# Altium PCB PCB3.PcbDoc
Units mil, origin at the board's own origin, x right, y up, seen from the top; angles counter-clockwise.
Board outline 3125 x 4000 mil, 2 copper layers (Top Layer, Bottom Layer); 12 components, 17 nets, 64 pads, 0 vias.
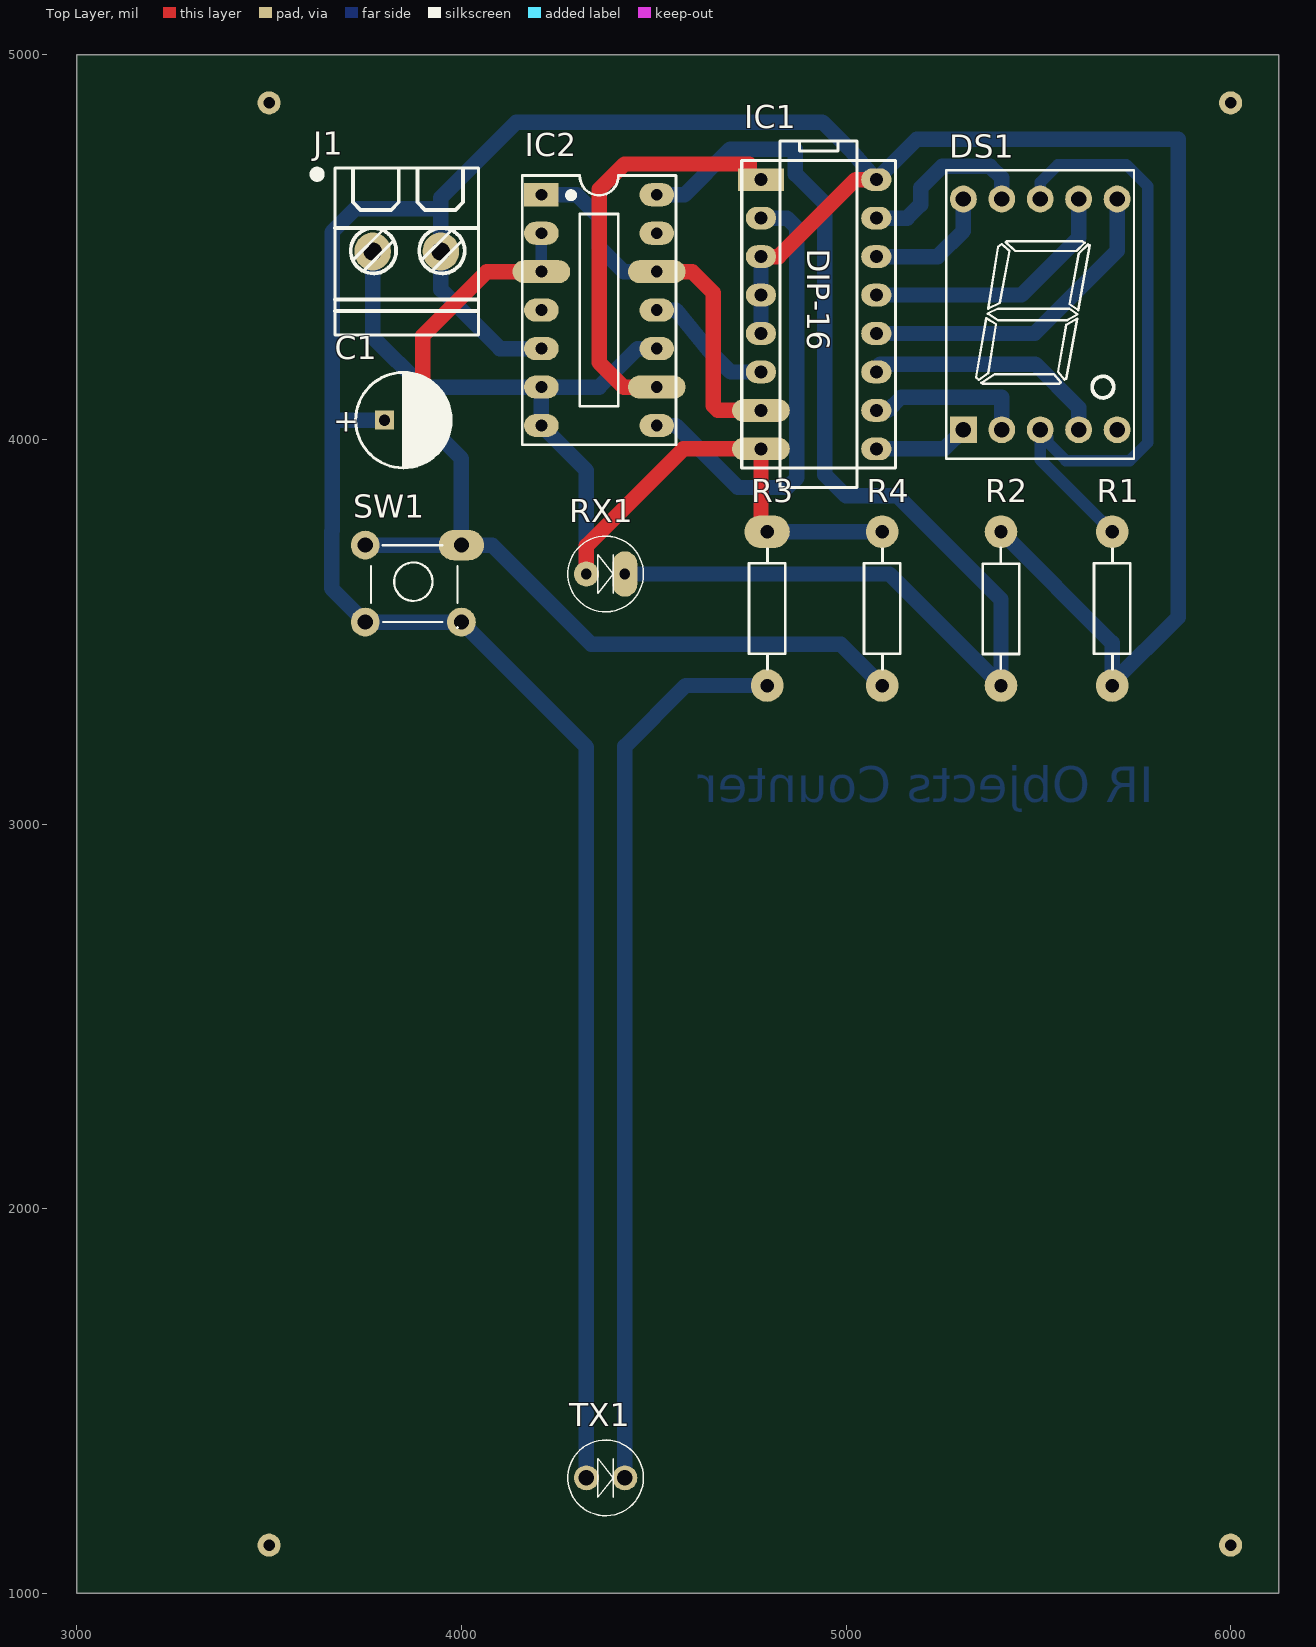
[diagram p0: Top Layer view]
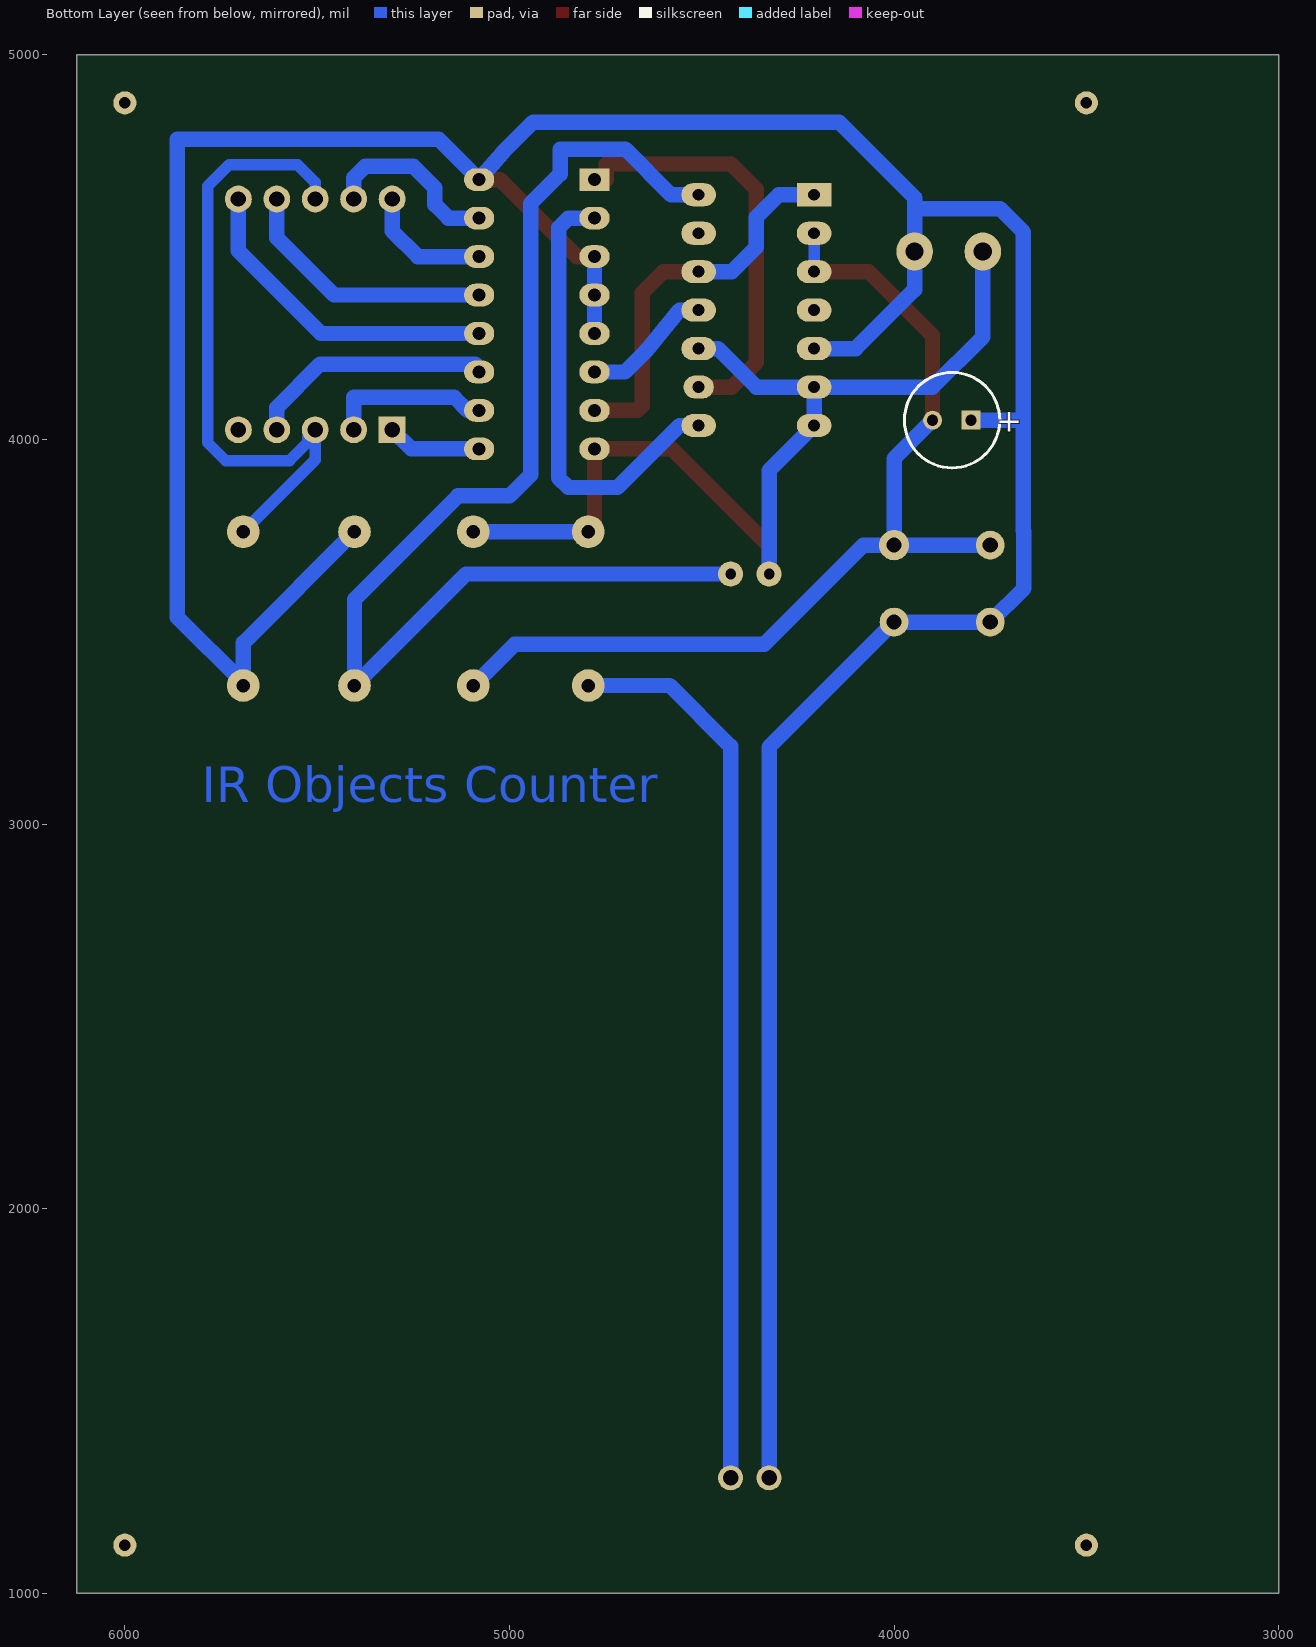
[diagram p1: Bottom Layer view, seen from below]
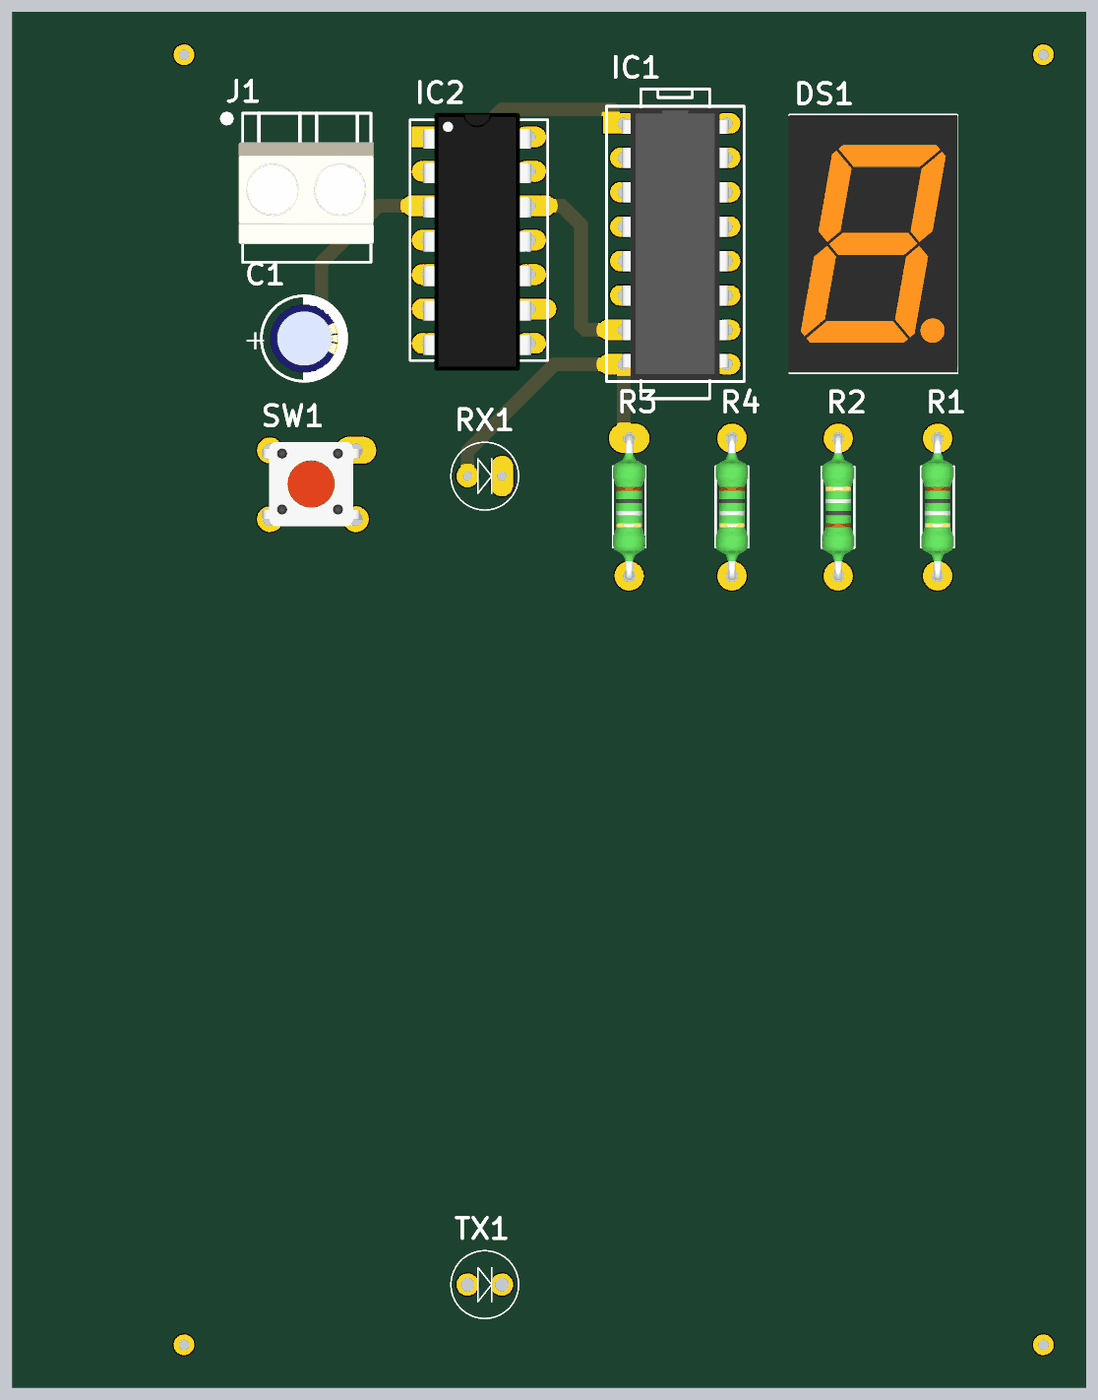
[diagram p2: 3D render of the assembled board from above, using the file's embedded part models]

## Layer stack, top to bottom
Top Solder: solder mask 0.4, Solder Resist, Dk 3.5
Top Layer: signal copper 1.4
Dielectric 1: dielectric 12.6, FR-4, Dk 4.8
Bottom Layer: signal copper 1.4
Bottom Solder: solder mask 0.4, Solder Resist, Dk 3.5

## Board outline
3000,1000 6125,1000 6125,5000 3000,5000

## Design rules (kind name [scope] priority, off if disabled: settings)
Clearance [All] p1: gap=30
PolygonConnect [All] p1: connectstyle=Relief reliefconductorwidth=10 reliefentries=4 polygonreliefangle="90 Angle" airgapwidth=10
RoutingCorners [All] p1: cornerstyle=90-Degree minsetback=100 maxsetback=100
RoutingVias [All] p1: holewidth=28 width=80 viastyle="Through Hole" minholewidth=28 minwidth=80 maxholewidth=28 maxwidth=80
SolderMaskExpansion [All] p1: expansion=4
Width [All] p1: maxlimit=40 minlimit=20 preferedwidth=40
29 further rules are at their usual default settings.

## Components (designator, comment, footprint, x,y, rotation, side; value= is the part's Value field where it differs from the comment)
C1 "Cap Pol" "RADIAL C" 3800,4050 r0 top
DS1 "7SEG" LED7SEG-1-0.56 5500,4300 r0 top
IC1 "7447" DIP16 4929,4325 r270 top
IC2 "7490" DIP14 4208,4636 r270 top
J1 "CON.Domino2" "Domino 2M" 4044,4272 r90 top
R1 "1KR" RES-1/4W#1 5697,3575 r90 top
R2 "1KR" RES-1/4W#1 5398,3545 r270 top
R3 "100R" RES-1/4W#2 4800,3575 r90 top
R4 "1KR" RES-1/4W#1 5099,3575 r90 top
RX1 "LED" LED-5MM-BLUE 4325,3650 r0 top
SW1 "SW" SW2-DIP 3750,3725 r0 top
TX1 "LED" LED-5MM-WHITE 4325,1300 r0 top

## Footprints (in the part's own frame and the unit in brackets; to place one, negate y for a bottom-side part, rotate by r counter-clockwise, add the part's x,y. Pads: shape width x height; smd on the part's side, far side on the other; paste and mask are expansions set on the pad)
DIP14 [mil] "DIP, 14-Leads, Row Spacing 7.62mm, Pitch 2.54mm, Body 19.2x6.6mm"
  rect 60x90 hole 31: 1(0,0)
  oval 60x90 hole 31: 2(100,0) 4(300,0) 5(400,0) 6(500,0) 7(600,0) 8(600,300) 10(400,300) 11(300,300) 13(100,300)
  oval 60x150 / inner oval 60x150 / far side oval 60x90 hole 31: 3(200,0) 12(200,300)
  oval 60x150 / inner oval 60x150 / far side oval 60x78.74 hole 31: 9(500,300)
  oval 60x90 / inner oval 60x150 / far side oval 60x90 hole 31: 14(0,300)
  silkscreen extent -50,-50 650,350, body extent -70,-12 680,302, height 145
DIP16 [mm]
  rect 1.5x3.048 / inner rect 1.5x3.048 / far side rect 1.5x2 hole 0.864: 1(-8.897,-3.812)
  oval 1.5x2 hole 0.864: 2(-6.357,-3.812) 3(-3.817,-3.812) 4(-1.277,-3.812) 5(1.263,-3.812) 6(3.803,-3.812) 9(8.883,3.808) 10(6.343,3.808) 11(3.803,3.808) 12(1.263,3.808) 13(-1.277,3.808) 14(-3.817,3.808) 15(-6.357,3.808) 16(-8.897,3.808)
  oval 1.5x3.81 / inner oval 1.5x3.81 / far side oval 1.5x2 hole 0.864: 7(6.343,-3.812) 8(8.883,-3.812)
  silkscreen extent -11.44,-5.08 11.42,5.08, body extent -10,-3.93 10,3.94, height 1.99
"Domino 2M" [mm]
  oval 2.5x2.4 hole 1.2: 1(5.5,6.975) 2(5.5,2.475)
  silkscreen extent 0,0 11,10.9, body extent 1.35,-0.22 8.85,9.78, height 10
LED7SEG-1-0.56 [mil]
  rect 70x70 hole 40: 1(-195,-275)
  round 70 hole 40: 2(-95,-275) 3(5,-275) 4(105,-275) 5(205,-275) 6(205,325) 7(105,325) 8(5,325) 9(-95,325) 10(-195,325)
  silkscreen extent -239,-350 249,400, body extent -241,-349 251,399, height 315
LED-5MM-BLUE [mil]
  round 65 hole 27.56: 1(0,0)
  oval 65x118.11 / inner oval 65x118.11 / far side round 65 hole 27.56: 2(100,0)
  silkscreen extent -48,-98 148,98, body extent -54,-105 155,105, height 370
LED-5MM-WHITE [mil]
  round 65 hole 40: 1(0,0) 2(100,0)
  silkscreen extent -48,-98 148,98, body extent -54,-105 155,105, height 370
"RADIAL C" [mm] "Capacitor, Electrolytic, Radial; Body 6.3 x 6.8 mm (Dia.xH typ); Pin Spacing 2.5 mm (typ)"
  rect 1.25x1.25 hole 0.75: 1(0,0)
  round 1.25 hole 0.75: 2(2.54,0)
  silkscreen extent -1.9,-3.15 4.4,3.15, body extent -1.27,-2.54 3.81,2.54, height 13.7
RES-1/4W#1 [mil]
  round 85 hole 35: 1(-215,5) 2(185,5)
  silkscreen extent -173,-42 141,52, body extent -227,-42 197,52, height 95
RES-1/4W#2 [mil]
  round 85 hole 35: 1(-215,5)
  oval 85x118.11 / inner oval 85x118.11 / far side round 85 hole 35: 2(185,5)
  silkscreen extent -173,-42 141,52, body extent -227,-42 197,52, height 95
SW2-DIP [mm] "SW button 4pin, 250 x250 mil"
  round 1.905 hole 1: 1(0,0) 2(0,-5.08) 3(6.35,-5.08)
  oval 3x2 / inner oval 3x2 / far side round 2 hole 1: 4(6.35,0)
  silkscreen extent 0.38,-5.46 6.1,0, body extent -0.9,-5.59 7,0.61, height 7

## Part data
C1: "Polarized Capacitor"
DS1: library part LED7SEG-1, "14.2 mm General Purpose Blue 7-Segment Display: CC, RH DP, Gray Surface"
IC1: "BCD to 7-Segment Decoder/Driver"
IC2: "4-Bit Decade Counter"
J1: "2 pins Domino Header"
R1 R2 R3 R4: library part Res, "Res"
RX1 TX1: "LED Single colour Green and Red"
SW1: library part SW4, "Switch button 4 pin"

## Free pads (board coordinates)
  round 60 hole 30: 0(6000,4875) 1(6000,1125) 2(3500,1125) 3(3500,4875)

## Nets (pads, with @x,y where several pads share a name; then routed paths per layer and width w, separated by ;. In a path a pad name is that pad's centre, name@x,y a point inside that pad or via, vN(x,y) a via of type N, cw(c..) or ccw(c..) an arc to the next point about the centre after c; other vN are vias at no path point)
GND: IC1.8 IC2.6 IC2.7 IC2.10 J1.1 R3.2 R4.2 RX1.1 | length 2752.3
  Top Layer w40: RX1.1 4325,3723 4577.29,3975.29 IC1.8 4778.92,3760 R3.2
  Bottom Layer w40: J1.1 3769.39,4266.61 3900,4136 IC2.6 ; RX1.1 4325,3919 IC2.7 IC2.6 ; IC2.10 4458,4236 4358,4136 IC2.6 ; R3.2 R4.2
NetC1_2: C1.2 IC2.2 IC2.3 R4.1 SW1.1 SW1.4 | length 2558.4
  Top Layer w40: C1.2 3900,4270 4066,4436 IC2.3
  Bottom Layer w30: IC2.3 IC2.2
  Bottom Layer w40: SW1.1 SW1.4 ; C1.2 4000,3950 SW1.4 ; R4.1 4987,3467 4338,3467 4080,3725 SW1.4
NetDS1_1: DS1.1 IC1.9 | length 246.7
  Bottom Layer w40: IC1.9 5255.29,3975.29 DS1.1
NetDS1_2: DS1.2 IC1.10 | length 425
  Bottom Layer w39.37: IC1.10 5109.29,4075.29 5143.69,4109.69 5405,4109.69 DS1.2
NetDS1_3: DS1.3 DS1.8 R1.2 | length 1727.3
  Bottom Layer w30: DS1.3@5505,4011.86 DS1.3 ; DS1.8 5505,4668 5551,4714 5729.14,4714 5785,4658.14 5785,3991.86 5738.14,3945 5571.86,3945 5525,3991.86 5525,4005 DS1.3 ; R1.2 5505,3947 DS1.3
NetDS1_4: DS1.4 IC1.11 | length 660.1
  Bottom Layer w40: IC1.11 5086.22,4168 5086.22,4193.22 5088.77,4195.77 5492.23,4195.77 5605,4083 DS1.4
NetDS1_6: DS1.6 IC1.12 | length 850
  Bottom Layer w40: IC1.12 5490.29,4275.29 5705,4490 DS1.6
NetDS1_7: DS1.7 IC1.13 | length 688.7
  Bottom Layer w40: IC1.13 5456.29,4375.29 5605,4524 DS1.7
NetDS1_9: DS1.9 IC1.15 | length 474.9
  Bottom Layer w40: IC1.15 5159,4575.29 5194,4610.29 5194,4654 5250,4710 5375,4710 5405,4680 DS1.9
NetDS1_10: DS1.10 IC1.14 | length 336.7
  Bottom Layer w40: IC1.14 5238.36,4475.29 5305,4541.94 DS1.10
NetIC1_1: IC1.1 IC2.9 | length 1115.5
  Top Layer w40: IC2.9 4422,4136 4358,4200 4358,4650 4424,4716 4748,4716 4748,4675.29 IC1.1
NetIC1_2: IC1.2 IC2.8 | length 1194.6
  Bottom Layer w40: IC2.8 4558,4036 4719,3875 4847,3875 4872,3900 4872,4550 4846.71,4575.29 IC1.2
NetIC1_6: IC1.6 IC2.11 | length 343.6
  Bottom Layer w40: IC2.11 4558,4336 4644,4231.29 4700,4175.29 IC1.6
NetIC1_7: IC1.7 IC2.1 IC2.12 | length 1020.9
  Top Layer w40: IC2.12 4600,4436 4655,4381 4655,4087.29 4667,4075.29 IC1.7
  Bottom Layer w40: IC2.1 4300,4636 4358,4578 4358,4500 4422,4436 IC2.12
NetIC2_14: IC2.14 R2.2 RX1.2 | length 3202.4
  Bottom Layer w40: RX1.2 5113,3650 R2.2 5403,3584 5134,3853 5000,3853 4945,3908 4945,4613 4868.3,4689.7 4868.3,4754.82 4698.82,4754.82 4580,4636 IC2.14
NetR3_1: R3.1 TX1.2 | length 2337.4
  Bottom Layer w40: TX1.2 4425,3202 4583,3360 R3.1
VCC: C1.1 IC1.3 IC1.4 IC1.5 IC1.16 IC2.5 J1.2 R1.1 R2.1 SW1.2 SW1.3 TX1.1 | length 9468.6
  Top Layer w40: IC1.3 4825,4475.29 5025,4675.29 IC1.16
  Bottom Layer w40: 3664,4050 C1.1 ; IC2.5 4100,4236 3946.56,4389.44 J1.2 ; TX1.1 4325,3200 SW1.3 SW1.2 3662.5,3612.5 3662.5,3761.24 3664,3762.74 3664,4539 3725,4600 3946.56,4600 J1.2 ; IC1.5 IC1.4 IC1.3 ; R2.1 5692,3471 5692,3366 5864,3538 5864,4780 5183.63,4780 IC1.16 5019,4744.12 4938.3,4824.82 4142.82,4824.82 3946.56,4628.56 J1.2
pads on no net: DS1.5 IC2.4 IC2.13

## Other copper
Bottom Layer:
  text "IR Objects Counter" at 5800,3025 h157.48

## Text inside footprints (layer, text, board x,y; h text height)
C1: Top Overlay "+" at 3667.13,4020.47 h59.06; Bottom Overlay "+" at 3667.13,4020.47 h59.06
IC1: Top Overlay "DIP-16" at 4898.92,4495.29 h59.05 r270